# Altium PCB PCB1.pcbdoc
Units mil, origin at the board's own origin, x right, y up, seen from the top; angles counter-clockwise.
Board outline 2805 x 4025 mil, 2 copper layers (Top Layer, Bottom Layer), stack 62.2 mil thick; 30 components, 34 nets, 171 pads, 95 vias.
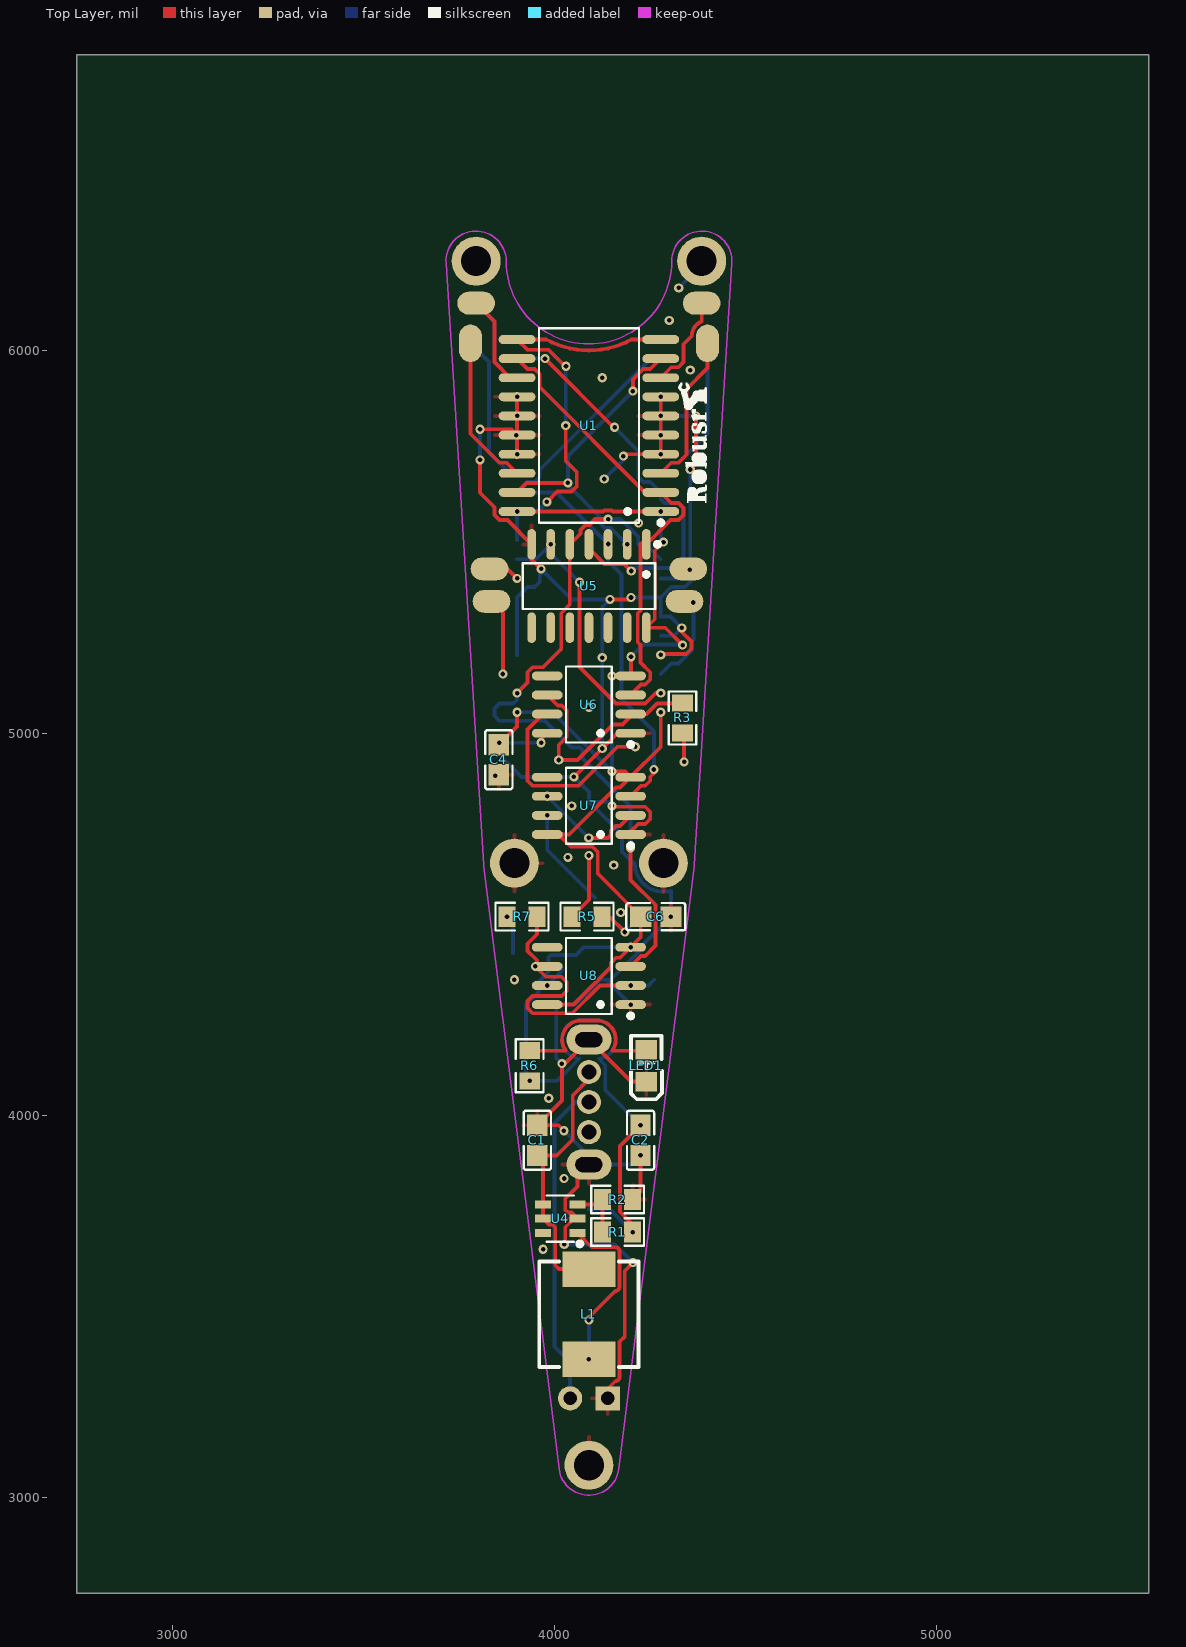
[diagram p0: Top Layer view]
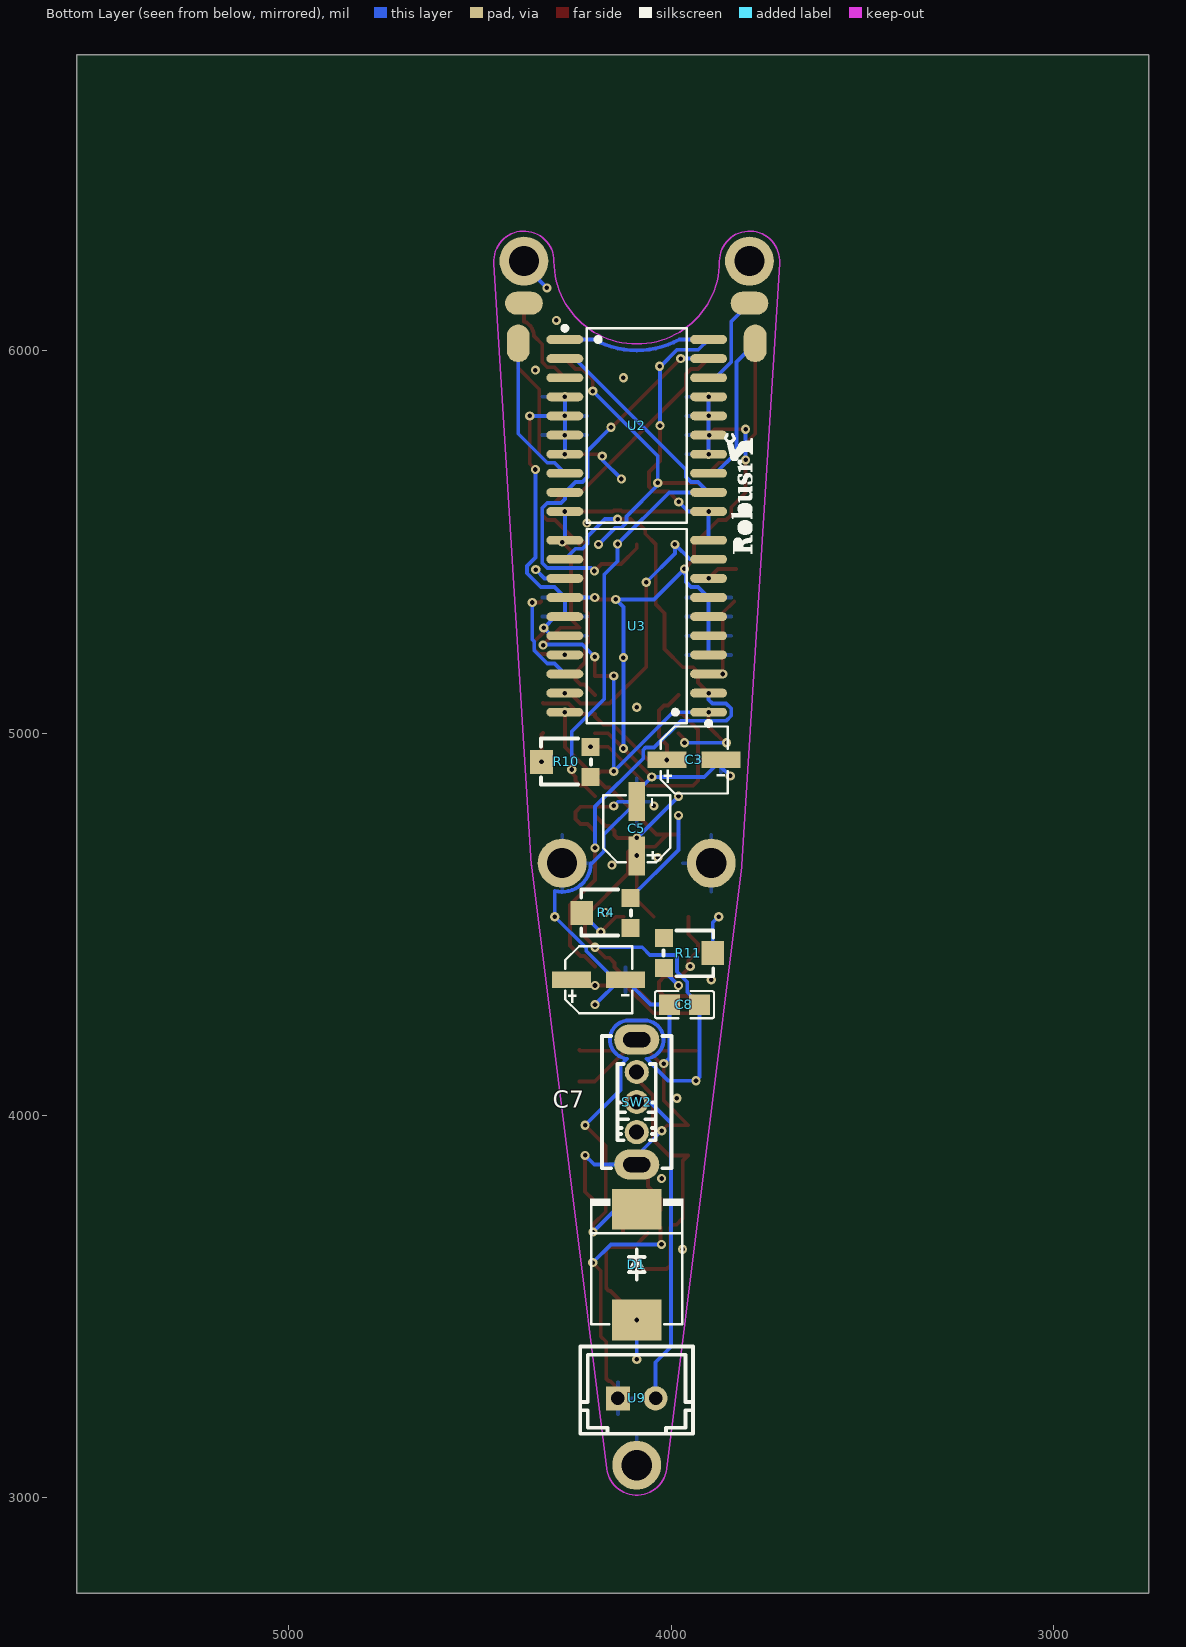
[diagram p1: Bottom Layer view, seen from below]

## Layer stack, top to bottom
Top Solder Mask Layer: solder mask 0.4, Dk 3.3
Top Layer: signal copper 1.4
Dielectric1: surface 59.4, FR4, Dk 4.5
Bottom Layer: signal copper 1.4
Bottom Solder Mask Layer: solder mask 0.4, Dk 3.3

## Board outline
5555,2750 2750,2750 2750,6775 5555,6775

## Design rules (kind name [scope] priority, off if disabled: settings)
BoardOutlineClearance copperThickness1oz [All] p0: genericclearance=10 ignorepadtopadclearanceinfootprint=FALSE except(0: Arc-SplitContinuation Track-SplitContinuation SMDPad-SplitContinuation THPad-SplitContinuation Via-SplitContinuation Fill-SplitContinuation Poly-SplitContinuation Region-SplitContinuation Text-SplitContinuation)
BoardOutlineClearance copperThickness2oz [All] p0: genericclearance=10 ignorepadtopadclearanceinfootprint=FALSE except(0: Arc-SplitContinuation Track-SplitContinuation SMDPad-SplitContinuation THPad-SplitContinuation Via-SplitContinuation Fill-SplitContinuation Poly-SplitContinuation Region-SplitContinuation Text-SplitContinuation)
BoardOutlineClearance Plane_innerPlane [All] p0: genericclearance=10 ignorepadtopadclearanceinfootprint=FALSE except(0: Arc-SplitContinuation Track-SplitContinuation SMDPad-SplitContinuation THPad-SplitContinuation Via-SplitContinuation Fill-SplitContinuation Poly-SplitContinuation Region-SplitContinuation Text-SplitContinuation)
BoardOutlineClearance Copper_copperRegion [All] p0: genericclearance=10 ignorepadtopadclearanceinfootprint=FALSE except(0: Arc-SplitContinuation Track-SplitContinuation SMDPad-SplitContinuation THPad-SplitContinuation Via-SplitContinuation Fill-SplitContinuation Poly-SplitContinuation Region-SplitContinuation Text-SplitContinuation)
BoardOutlineClearance otherClearance [All] p0: genericclearance=10 ignorepadtopadclearanceinfootprint=FALSE except(0: Arc-SplitContinuation Track-SplitContinuation SMDPad-SplitContinuation THPad-SplitContinuation Via-SplitContinuation Fill-SplitContinuation Poly-SplitContinuation Region-SplitContinuation Text-SplitContinuation)
Clearance copperThickness1oz [All] p1: gap=7 ignorepadtopadclearanceinfootprint=FALSE
Clearance copperThickness2oz [All] p1: gap=7 ignorepadtopadclearanceinfootprint=FALSE
Clearance Plane_innerPlane [All] p1: gap=7 ignorepadtopadclearanceinfootprint=FALSE
Clearance Copper_copperRegion [All] p1: gap=7 ignorepadtopadclearanceinfootprint=FALSE
Clearance otherClearance [All] p1: gap=7 ignorepadtopadclearanceinfootprint=FALSE
DiffPairsRouting differentialPair [All] p1: maxuncoupledlength=10 minlimit=6 maxlimit=Infinity mostfreqgap=6 toplayer_minwidth=5 toplayer_prefwidth=10 toplayer_maxwidth=100 bottomlayer_minwidth=5 bottomlayer_prefwidth=10 bottomlayer_maxwidth=100
PasteMaskExpansion pasteMaskExpansion [All] p1: expansion=0
PlaneConnect innerPlane [All] p1: planeconnectstyle=Relief reliefexpansion=20 reliefentries=4 reliefconductorwidth=10 reliefairgap=10
PolygonConnect copperRegion [All] p1: connectstyle=Relief reliefentries=4 reliefconductorwidth=10 polygonreliefangle="90 Angle" airgapwidth=10
RoutingVias viaSize [All] p1: viastyle="Through Hole" holewidth=12.0078 minholewidth=11.811 maxholewidth=248.0314 width=12.0078 minwidth=11.811 maxwidth=248.0314
SolderMaskExpansion solderMaskExpansion [IsVia] p1: useseparateexpansions=TRUE expansion=-1000 expansionbottom=-1000
SolderMaskExpansion solderMaskExpansion [All] p2: useseparateexpansions=TRUE expansion=2 expansionbottom=2
Width copperThickness1oz [All] p1: maxlimit=100 minlimit=5 preferedwidth=10
Width copperThickness2oz [All] p1: maxlimit=100 minlimit=8 preferedwidth=10

## Components (designator, comment, footprint, x,y, rotation, side; value= is the part's Value field where it differs from the comment)
C1 "22uF" C0805#1 3955,3935 r90 top locked
C2 "22uF" C0805#1 4225,3935 r270 top locked
C3 "10uF" CAP-SMD_BD4.0-L4.3-W4.3-LS5.1-FD 3940,4930 r180 bottom locked
C4 "100nF" C0805#2 3854.4,4930.6 r90 top locked
C5 "10uF" CAP-SMD_BD4.0-L4.3-W4.3-LS5.1-FD 4090,4750 r90 bottom locked
C6 "100nF" C0805#1 4265,4520 r180 top locked
C7 "10uF" CAP-SMD_BD4.0-L4.3-W4.3-LS5.1-FD 4190,4355 r180 bottom locked
C8 "100nF" C0805#1 3965,4290 r180 bottom locked
D1 "SS34" SMC_L6.9-W5.9-LS7.9-RD 4090,3610 r270 bottom locked
L1 "10uH" IND-SMD_L7.3-W6.8 4090,3480 r90 top locked
LED1 "GL0805UG01" LED0805-FD 4240,4130 r270 top locked
R1 "16kΩ" R0805 4165,3695 r0 top locked
R2 "2.2kΩ" R0805 4165,3780 r180 top locked
R3 "10kΩ" R0805 4335,5040 r270 top locked
R4 "100kΩ" RES-ADJ-SMD_JER33X-1-14 4170,4530 r90 bottom locked
R5 "10kΩ" R0805 4085,4520 r0 top locked
R6 "1kΩ" R0805 3935,4130 r90 top locked
R7 "10kΩ" R0805 3915,4520 r180 top locked
R10 "100kΩ" RES-ADJ-SMD_JER33X-1-14 4275,4925 r90 bottom locked
R11 "100kΩ" RES-ADJ-SMD_JER33X-1-14 3955,4425 r270 bottom locked
SW2 "SS12D07VG4 087" SW-TH_SS12D07VG4 4090,4035 r90 bottom locked
U1 "L293DD013TR" SOP-20_L13.2-W7.8-P1.27-LS10.4-BL 4090,5805 r90 top locked
U2 "L293DD013TR" SOP-20_L13.2-W7.8-P1.27-LS10.4-BL 4090,5805 r270 bottom locked
U3 "L293DD013TR" SOP-20_L13.2-W7.8-P1.27-LS10.4-BL 4090,5280 r90 bottom locked
U4 "MT3608" SOT-23-6_L2.9-W1.6-P0.95-LS2.8-BL 4015,3730 r90 top locked
U5 "74HC04D,653" SOIC-14_L8.7-W3.9-P1.27-LS6.0-BL 4090,5385 r180 top locked
U6 "NE555DR" SOIC-8_L4.9-W3.9-P1.27-LS6.0-BL 4090,5075 r90 top locked
U7 "NE555DR" SOIC-8_L4.9-W3.9-P1.27-LS6.0-BL 4090,4810 r90 top locked
U8 "NE555DR" SOIC-8_L4.9-W3.9-P1.27-LS6.0-BL 4090,4365 r90 top locked
U9 "WAFER-XH254Z-2AM" CONN-TH_2P-P2.50_XH-2A_3045048 4090,3260 r180 bottom locked

## Footprints (in the part's own frame and the unit in brackets; to place one, negate y for a bottom-side part, rotate by r counter-clockwise, add the part's x,y. Pads: shape width x height; smd on the part's side, far side on the other; paste and mask are expansions set on the pad)
C0805#1 [mil]
  rect 55.5x53.1 smd paste-3937 mask+2: 1(-39.4,0) 2(39.4,0)
  silkscreen extent -77,-36 77,36
C0805#2 [mil]
  rect 55.5x53.1 smd paste-3937 mask+2: 1(-39.3,0) 2(39.4,0)
  silkscreen extent -77,-36 77,36
CAP-SMD_BD4.0-L4.3-W4.3-LS5.1-FD [mil]
  rect 102.4x43.3 smd: 1(-70.9,0) 2(70.9,0)
  silkscreen extent -87,-88 88,88
CONN-TH_2P-P2.50_XH-2A_3045048 [mil]
  rect 63x63 hole 35.4 paste+0 mask+2: 1(-49.2,0)
  round 63 hole 35.4 paste+0 mask+2: 2(49.2,0)
  silkscreen extent -148,-93 148,136
IND-SMD_L7.3-W6.8 [mil]
  rect 92.5x137.8 smd: 1(-118.1,0) 2(118.1,0)
  silkscreen extent -138,-130 138,130
LED0805-FD [mil]
  rect 51.2x55.1 smd: 1(-41.4,0) 2(41.3,0)
  silkscreen extent -78,-40 88,41
R0805 [mil]
  rect 44.6x54.2 smd paste-3937 mask+2: 1(-39.4,0) 2(39.4,0)
  silkscreen extent -69,-36 69,36
RES-ADJ-SMD_JER33X-1-14 [mil]
  rect 47.2x47.2 smd paste+0 mask+2: 1(39.4,-64) 3(-39.4,-64)
  rect 63x59.1 smd paste+0 mask+2: 2(0,64)
  silkscreen extent -59,-65 61,65
SMC_L6.9-W5.9-LS7.9-RD [mil]
  rect 106.3x129.9 smd: 1(-145.1,0) 2(145.1,0)
  silkscreen extent -172,-122 157,122
SOIC-8_L4.9-W3.9-P1.27-LS6.0-BL [mil]
  oval 23.1x80.5 smd: 1(-75,-109.1) 2(-25,-109.1) 3(25,-109.1) 4(75,-109.1) 5(75,109.2) 6(25,109.2) 7(-25,109.2) 8(-75,109.2)
  silkscreen extent -110,-115 100,60
SOIC-14_L8.7-W3.9-P1.27-LS6.0-BL [mil]
  oval 22.6x80.2 smd: 1(-150,-109) 2(-100,-109) 3(-50,-109) 4(0,-109) 5(50,-109) 6(100,-109) 7(150,-109) 8(150,109) 9(100,109) 10(50,109) 11(0,109) 12(-50,109) 13(-100,109) 14(-150,109)
  silkscreen extent -185,-115 173,60
SOP-20_L13.2-W7.8-P1.27-LS10.4-BL [mil]
  oval 23.1x96.5 smd: 1(-225,-188) 2(-175,-188) 3(-125,-188) 4(-75,-188) 5(-25,-188) 6(25,-188) 7(75,-188) 8(125,-188) 9(175,-188) 10(225,-188) 11(225,188) 12(175,188) 13(125,188) 14(75,188) 15(25,188) 16(-25,188) 17(-75,188) 18(-125,188) 19(-175,188) 20(-225,188)
  silkscreen extent -260,-194 254,131
SOT-23-6_L2.9-W1.6-P0.95-LS2.8-BL [mil]
  rect 20.9x42.2 smd: 1(-37.4,-45.2) 2(0,-45.2) 3(37.4,-45.2) 4(37.4,45.2) 5(0,45.2) 6(-37.4,45.2)
  silkscreen extent -72,-57 61,35
SW-TH_SS12D07VG4 [mil]
  round 63 hole 39.4: 1(-78.7,0) 2(0,0) 3(78.7,0)
  oval 78.7x118.1 hole 39.4 slot 70.9 at 90 deg: 4(163.4,0) 5(-163.4,0)
  silkscreen extent -173,-91 173,91

## Free pads (board coordinates)
  oval 60x98.4 smd: 1(3780,6020) 1(4400,6020)
  oval 60x98.4 smd far side: 1(3780,6020) 1(4400,6020)
  oval 98.4x60 smd: 1(3795,6125) 1(3830,5430) 1(3835,5345) 1(4340,5345) 1(4350,5430) 1(4385,6125)
  oval 98.4x60 smd far side: 1(3795,6125) 1(4385,6125)
  round 128 hole 78.7: 1(3795,6235) 1(3895,4660) 1(4090,3085) 1(4285,4660) 2(4385,6235)

## Via types
v1: diameter 24, hole 12, Top Layer to Bottom Layer, 95 vias

## Nets (pads, with @x,y where several pads share a name; then routed paths per layer and width w, separated by ;. In a path a pad name is that pad's centre, name@x,y a point inside that pad or via, vN(x,y) a via of type N, cw(c..) or ccw(c..) an arc to the next point about the centre after c; other vN are vias at no path point)
3.7V: SW2.2 U9.2 | length 849.7
  Bottom Layer w10: U9.2 4040.8,3354.2 4000,3395 4000,3980 4055,4035 SW2.2
5V: C2.1 C4.2 C6.2 C8.2 D1.1 R1.2 R6.1 U1.1 U1.10 U1.11 U1.20 U2.1 U2.10 U2.11 U2.20 U3.1 U3.10 U3.11 U3.20 U5.14 U6.4 U6.8 U7.4 U7.8 U8.4 U8.8 | length 6538
  Top Layer w10: C4.2 3902,5017.6 v1(3902,5055) ; v1(3902,5580) 4127.5,5580 4130.5,5583 4149.5,5583 4152.5,5580 v1(4278,5580) ; v1(3965,4975) 3965,4984.1 U6.8 ; 3978.2,6030 U1.11 3929,6003 3984.5,6003 4027.5,5960 v1(4030,5960) ; 3978.32,6029.97 ccw(c4090,6234.8) 4201.68,6029.97 ; v1(3980,5605) 4007,5632 4044.5,5632 4058,5645.5 4058,5683 4029.2,5711.7 v1(4029.2,5804.7) ; U8.8 4049.2,4290 4147.9,4388.8 4147.9,4399.3 4161.1,4412.6 4171.7,4412.6 v1(4199.1,4440) 4225.6,4466.5 C6.2 4113,4632.6 4113,4689.5 4099.5,4703 4042.6,4703 U7.8@4010.6,4735 ; U7.8 U7.8@4010.6,4735 ; v1(4150,4900) 4184.1,4900 U7.4 ; v1(4150,5150) U6.4 4200,5150.9 v1(4200,5200) ; 4201.8,6030 U1.10 ; v1(4204.4,3695) 4204.4,3715.1 4171.1,3748.3 4171.1,3920.5 v1(4225,3974.4) ; v1(4278,5055) 4278,4963.8 U7.4 ; v1(4285,5500) 4262.3,5477.3 4262.3,5298.3 U5.14 4289.5,5276 v1(4335,5230.5) ; U7.8@4010.6,4735 4038.6,4735 4161.1,4857.6 4171.7,4857.6 U7.4
  Bottom Layer w10: v1(3855,4975) v1(3965,4975) ; v1(3902,5055) 3995,5055 v1(4150,4900) v1(4150,5150) ; U3.10 v1(3902,5580) 3955,5580 v1(3980,5605) ; 3978.2,6030 U2.20 3929,6003 3984.5,6003 4029.2,5958.3 v1(4029.2,5804.7) ; 3978.32,6029.97 ccw(c4090,6234.8) 4201.68,6029.97 ; 4064.51,4148.33 cw(c4070.3,4198.4) 4070.3,4248.8 ; 4064.5,4148.4 4006.8,4090.6 v1(3935,4090.6) 3925.6,4100 C8.2 3957.9,4322.2 3957.9,4349.5 3984.4,4376 3984.4,4413.8 3990.8,4420.2 4055.9,4420.2 4075.6,4440 v1@4200,4440 ; 4070.3,4248.7 4109.7,4248.7 ; D1.1 4144.2,3755.1 v1(4204.4,3695) ; 4109.7,4248.8 cw(c4109.7,4198.4) 4115.49,4148.33 ; 4115.5,4148.4 4132.5,4131.3 4132.5,4066.9 v1(4225,3974.4) ; v1(4200,5200) 4232.4,5232.4 4324,5232.4 4325.9,5230.5 v1(4335,5230.5) ; 4201.8,6030 U2.1 ; U3.11 v1(4278,5580)
$1N11: D1.2 L1.1 U4.1 | length 448.8
  Top Layer w10: U4.1 4097.5,3655.4 4158.9,3655.4 cw(c4158.9,3644.4) 4169.9,3644.4 4169.9,3551.8 cw(c4158.9,3551.8) 4158.9,3540.8 ; v1(4090,3464.9) 4090,3472 4158.9,3540.9
  Bottom Layer w10: v1(4090,3361.9) v1(4090,3464.9)
$1N13: R1.1 R2.2 U4.3 | length 155.6
  Top Layer w10: U4.3 4113,3767.4 R2.2 R1.1
$1N18: R10.1 U6.7 | length 530.8
  Top Layer w10: U6.7 3970.3,5050 3929.6,5009.3 3929.6,4875.7 3942.8,4862.4 4062.4,4862.4 4164.4,4964.4 v1(4211,4964.4)
$1N19: R3.2 R10.2 | length 77.3
  Top Layer w10: R3.2 4339,4996.6 v1(4339,4925)
$1N20: C3.1 R3.1 U6.2 U6.6 | length 595.7
  Top Layer w10: U6.6 4008.3,5072.6 4018.9,5072.6 4032.1,5059.3 4032.1,4990.7 4010.9,4969.4 v1(4010.9,4930) 4060,4930 4152.6,5022.6 4177.6,5022.6 4199.1,5044.1 U6.2 4240.5,5050 4268.5,5078 4333.6,5078 R3.1
$1N23: C5.1 R5.1 U7.2 U7.6 | length 472.7
  Top Layer w10: R5.1 4090,4564.4 v1(4090,4680) ; v1(4089.5,4726) 4140.1,4726 4147.9,4733.8 4147.9,4744.3 4161.1,4757.6 4171.7,4757.6 U7.2
  Bottom Layer w10: v1(3980.8,4835) 3980.8,4834.6 v1(4089.5,4726)
$1N24: R4.2 R5.2 | length 146.8
  Top Layer w10: R5.2 4143.9,4520 v1(4184,4480)
  Bottom Layer w10: v1(4184,4480) R4.2
$1N25: R4.1 U7.7 | length 267.5
  Bottom Layer w10: v1(3980.8,4785) 3980.8,4694.5 R4.1
$1N29: C7.1 R7.1 U8.2 U8.6 | length 780.1
  Top Layer w10: R7.1 3954.4,4474.1 3929.6,4449.3 3929.6,4430.7 3954.4,4405.9 3954.4,4394.4 v1(3950,4390) 3977,4363 4018.4,4363 4032.1,4349.3 4032.1,4325.8 4018.9,4312.6 3942.8,4312.6 3929.6,4299.3 3929.6,4280.7 3942.8,4267.4 4046.4,4267.4 4119,4340 v1(4199.1,4340)
  Bottom Layer w10: v1(4199.1,4340) 4245.9,4340 C7.1
$1N30: R7.2 R11.2 | length 101.4
  Bottom Layer w10: v1(3875.6,4520) 3891,4504.6 R11.2
$1N31: R11.1 U8.7 | length 61.5
  Bottom Layer w10: v1(3980.8,4340) 4019,4378.1 R11.1
$1N91: LED1.1 R6.2 | length 443.9
  Top Layer w10: R6.2 4029.2,4169.4 ; 4029.12,4169.35 cw(c4070.3,4198.4) 4070.3,4248.8 ; 4070.3,4248.7 4109.7,4248.7 ; 4109.7,4248.8 cw(c4109.7,4198.4) 4150.88,4169.35 ; 4150.8,4169.4 4238,4169.4 LED1.1
GND: C1.2 C2.2 C3.2 C4.1 C5.2 C6.1 C7.2 C8.1 LED1.2 pad.1@3895,4660 pad.1@4090,3085 pad.1@4285,4660 pad.2 R2.1 SW2.4 SW2.5 U1.4 U1.5 U1.6 U1.7 U1.14 U1.15 U1.16 U1.17 U2.4 U2.5 U2.6 U2.7 U2.14 U2.15 U2.16 U2.17 U3.4 U3.5 U3.6 U3.7 U3.14 U3.15 U3.16 U3.17 U4.2 U5.7 U6.1 U7.1 U8.1 U9.1 | length 7065.1
  Top Layer w10: v1(3805,5715) 3805,5629 3842.8,5591.2 3842.8,5570.7 3856,5557.4 3876.6,5557.4 U5.7 3940,5455 v1(3965,5430) ; v1(3805,5795) 3887,5795 U1.16 ; v1(3902,5730) U1.16 ; v1(3902,5880) v1(3902,5830) U1.16 ; v1(4024.5,3960) 4010.2,3974.4 C1.2 4019.3,4038.7 v1(4019.3,4135.7) 4027.3,4135.7 SW2.4 4199.7,4088.7 LED1.2 ; v1(4025.2,3662.6) 4028.2,3665.5 4028.2,3707.6 4050.5,3730 U4.2 4044.3,3745.9 4034.6,3745.9 4028.2,3752.4 4028.2,3782.4 4060.2,3814.5 4060.2,3841.9 SW2.5 ; v1(4050.8,4885.8) v1(4125,4960) 4165,5000 U6.1 ; U9.1 4139.2,3285 4158.9,3304.6 ccw(c4158.9,3315.6) 4169.9,3315.6 4169.9,3408.2 4183.9,3422.2 4183.9,3593.9 v1(4205,3615) ; v1(4145,5350) 4195,5350 v1(4200,5355) ; v1(4150,4810) 4158.7,4810 4161.1,4807.6 4237.2,4807.6 4250.4,4794.3 4250.4,4775.7 4237.2,4762.4 4219,4762.4 4199.1,4742.6 U7.1 ; v1(4180,5725) 4185,5730 v1(4278,5730) v1(4278,5780) v1(4278,5830) v1(4278,5880) ; R2.1 4225,3800.6 v1(4225,3895.6) ; v1(4278,5205) 4280.5,5207.5 4344.5,5207.5 4358,5221 4358,5240 4333,5265 v1(4333,5275.5) ; v1(4355,5690) 4370,5705 v1(4370,5830)
  Bottom Layer w10: v1(3805,5715) v1(3805,5795) ; v1(3845.3,4888.2) 3869.1,4912 C3.2 3913.4,4885.8 v1(4050.8,4885.8) 4090,4846.5 C5.2 ; U3.4 U3.5 U3.6 U3.7 3929.5,5382.4 3948,5382.4 3961.2,5395.7 3961.2,5414.2 3965,5418 v1(3965,5430) 4045,5350 v1(4145,5350) 4125,5330 v1(4125,5197.8) v1(4125,4960) ; v1(3902,5730) U2.15 v1(3902,5830) v1(3902,5880) ; v1(4019.3,4135.7) 4004.4,4150.6 C8.1 4054.1,4290 C7.2 C7.2@4134.1,4355 ; v1(4024.5,3960) 4090,3894.5 SW2.5 4201,3871.6 v1(4225,3895.6) ; v1(4025.2,3662.6) 4157.4,3662.6 v1(4205,3615) ; v1(4130,5665) 4180,5715 v1(4180,5725) ; v1(4150,4810) 4139.1,4820.9 C5.2 ; v1(4199.1,4290) C7.2@4134.1,4355 ; v1(4200,5355) U3.14 ; U3.16 4312.5,5255 v1(4333,5275.5) 4303.4,5305 U3.15 U3.14 ; v1(4278,5730) v1(4278,5780) v1(4278,5830) ; v1(4278,5880) v1(4278,5830) ; 4304.41,4587.56 cw(c4285,4660) 4210,4660 4206.6,4660 4176.2,4690.5 4176.2,4734.7 C5.2 ; 4304.4,4587.6 v1(4304.4,4520) 4222.1,4437.8 4222.1,4430.5 4146.7,4355 C7.2@4134.1,4355 ; v1(4325,6165) 4385,6225 pad.2 ; v1(4355,5690) 4355,5459.8 4377.2,5437.5 4377.2,5418.5 4341.2,5382.4 4305.4,5382.4 U3.14 ; v1(4370,5830) v1(4278,5830)
  other v1: 3970,3650 4025,3835 3985,4045 3895,4355 4173,4531 4155,4655 4035,4675 4045,4810 4090,5068.1 4220,5550 3900,5780 4125,5930 4355,5950 4300,6080
M1GND: pad.1@4385,6125 U1.8 | length 250.2
  Top Layer w10: U1.8 4305.4,5957.4 4324,5957.4 4337.2,5970.7 4337.2,6017.4 4359,6039.2 cw(c4400,6039.2) 4384.97,6077.35 ; 4385,6077.4 pad.1@4385,6125
M1VCC: pad.1@4400,6020 U1.3 | length 401.4
  Top Layer w10: U1.3 4305.4,5707.4 4324,5707.4 4345,5728.5 4345,5900 4400,5955 pad.1@4400,6020
M2GND: pad.1@3780,6020 U1.18 | length 401.4
  Top Layer w10: pad.1@3780,6020 3780,5783.5 3856,5707.4 3874.6,5707.4 U1.18
M2VCC: pad.1@3795,6125 U1.13 | length 250.2
  Top Layer w10: pad.1@3795,6125 3842.8,6077.2 3842.8,5970.7 3883.5,5930 U1.13
M3GND: pad.1@4400,6020 U2.8 | length 401.4
  Bottom Layer w10: U2.8 4305.4,5707.4 4324,5707.4 4400,5783.5 pad.1@4400,6020
M3VCC: U2.3
M4GND: pad.1@3780,6020 U2.13 | length 401.4
  Bottom Layer w10: pad.1@3780,6020 3828.8,5971.2 3828.8,5734.7 3883.5,5680 U2.13
M4VCC: pad.1@3795,6125 U2.18 | length 250.2
  Bottom Layer w10: pad.1@3795,6125 3842.8,6077.2 3842.8,5970.7 3883.5,5930 U2.18
M5GND: pad.1@3830,5430 U3.8 | length 82.4
  Top Layer w10: pad.1@3830,5430 3877,5430 v1(3902,5405)
M5VCC: pad.1@3835,5345 U3.3 | length 202.4
  Top Layer w10: pad.1@3835,5345 3865,5315 v1(3865,5155)
M6GND: pad.1@4350,5430 U3.13 | length 90.7
  Top Layer w10: pad.1@4350.1,5430.1 4352.1,5428 v1(4354.2,5428)
  Bottom Layer w10: U3.13 4331.2,5405 v1(4354.2,5428)
M6VCC: pad.1@4340,5345 U3.18 | length 257.7
  Top Layer w10: pad.1@4340,5345 4343,5342 v1(4363.3,5342)
  Bottom Layer w10: U3.18 4305.4,5182.4 4324,5182.4 4358,5216.4 4358,5240 4363.3,5245.4 v1(4363.3,5342)
MA: U1.9 U1.19 U5.2 | length 814.7
  Top Layer w10: U1.19 3927,5655 v1(4035,5655) ; v1(4205,5895) 4205,5925.6 4232,5952.6 4250.5,5952.6 U1.9
  Bottom Layer w10: v1(4190,5494) 4147,5537 4130.5,5537 4117,5550.5 4117,5567 4035,5649 v1(4035,5655) 4035,5725 v1(4205,5895)
MB: U2.9 U2.19 U5.4 | length 1081.7
  Top Layer w10: v1(3975,5980) 4154.7,5800.3 v1(4157.2,5800.3) ; U5.4 4090,5483.7 4130.8,5442.9 4182.1,5442.9 v1(4200.7,5424.3)
  Bottom Layer w10: U2.19 v1(3975,5980) ; v1(4157.2,5800.3) 4218.8,5738.7 4218.8,5670.7 4232,5657.4 4250.5,5657.4 U2.9 4278,5612.5 4287.9,5602.6 4324,5602.6 4337.2,5589.3 4337.2,5445.7 4324,5432.4 4208.8,5432.4 v1(4200.7,5424.3)
MC: U3.9 U3.19 U5.6 | length 720
  Top Layer w10: v1(4065,5395) 4065,5173.6 4161.1,5077.4 4237.2,5077.4 4264.7,5105 v1(4278,5105)
  Bottom Layer w10: U3.9 3951,5455 v1(3990,5494) 3990,5470 v1(4065,5395)
SA: U1.2 U1.12 U5.1 U6.3 | length 1223.3
  Top Layer w10: U1.12 3929.5,5952.6 3948,5952.6 3961.2,5939.3 3961.2,5905.3 4236.5,5630 U1.2 4305.4,5602.6 4324,5602.6 4337.2,5589.3 4337.2,5570.7 4324,5557.4 4303.4,5557.4 U5.1 4240,5495 4235.6,5499.4 4229.4,5499.4 4225,5495 4225,5321.3 4217.7,5314 4217.7,5237.9 4225,5230.6 4225,5184.7 4250.4,5159.3 4250.4,5140.7 4237.2,5127.4 4226.6,5127.4 U6.3
SB: U2.2 U2.12 U5.3 U7.3 | length 1566.8
  Top Layer w10: U7.3 4226.6,4862.4 4237.2,4862.4 4250.4,4875.7 4250.4,4886.2 4260,4895.9 v1(4260,4905)
  Bottom Layer w10: v1(4260,4905) 4260,5004.4 4175,5089.4 4175,5415 4140,5450 v1(4140,5495) 4005,5630 U2.12 3929.5,5657.4 3948,5657.4 3961.2,5670.7 3961.2,5689.2 4252,5980 U2.2
SC: U3.2 U3.12 U5.5 U8.3 | length 1838.9
  Top Layer w10: v1(3902,5105) 3929.6,5132.6 3929.6,5159.3 3942.8,5172.6 3969.6,5172.6 4017.7,5220.7 4017.7,5314 4040,5336.3 U5.5 4067.7,5521.7 4067.7,5532.1 4080.8,5545.1 4091.1,5545.1 4106,5560 v1(4140,5560) ; U8.3 4226.6,4417.4 4237.2,4417.4 4264.4,4444.6 4264.4,4551.1 4199.1,4616.3 v1(4199.1,4700)
  Bottom Layer w10: v1(3902,5105) 3902,5087.5 3892.1,5077.6 3856,5077.6 3842.8,5064.3 3842.8,5045.7 3856,5032.4 3892.1,5032.4 3892.5,5032 3911.5,5032 3912,5032.4 3974.6,5032.4 4044.4,4962.6 4066.6,4962.6 4073,4956.2 4073,4934 4199.1,4807.9 v1(4199.1,4700) ; v1(4140,5560) 4173,5560 4218.8,5514.2 4218.8,5495.7 4232,5482.4 4250.5,5482.4 U3.12
VIN: C1.1 L1.2 SW2.3 U4.4 U4.5 | length 708.5
  Top Layer w10: L1.2 4011.9,3598.1 4001.8,3608.2 4001.8,3707.6 3995.4,3714.1 3985.7,3714.1 U4.5 U4.4 3969.8,3880.9 C1.1 4005.6,3895.6 4047.5,3937.5 4047.5,4052.6 4090,4095.1 SW2.3
pads on no net: R4.3 R10.3 R11.3 SW2.1 U4.6 U5.8 U5.9 U5.10 U5.11 U5.12 U5.13 U6.5 U7.5 U8.5

## Polygon pours and split planes (outlines as drawn)
GND on Bottom Layer (solid, remove dead copper, pour order 2): 3710,6320 3710,3000 4470,3000 4470,6320
GND on Top Layer (solid, remove dead copper, pour order 0): 3710,6320 3710,3000 4470,3000 4470,6320

## Keep-outs
Board Outline Layer:
  lines w3.9: 3716,6237.8 3716.7,6245.6 3718.2,6253.4 3720.4,6260.9 3723.4,6268.2 3727.1,6275.2 3731.5,6281.7 3736.5,6287.8 3742.1,6293.4 3748.2,6298.3 3754.8,6302.7 3761.8,6306.3 3769.1,6309.3 3776.7,6311.4 3784.4,6312.9 3792.3,6313.5 3800.1,6313.4 3808,6312.4 3815.7,6310.7 3823.1,6308.2 3830.3,6305 3837.2,6301.1 3843.6,6296.5 3849.5,6291.3 3854.9,6285.6 3859.7,6279.3 3863.8,6272.6 3867.2,6265.5 3869.9,6258.1 3871.9,6250.5 3873.1,6242.7 3873.5,6234.8 3873.9,6221.7 3875,6208.7 3877,6195.8 3879.8,6183 3883.3,6170.4 3887.5,6158 3892.5,6145.9 3898.3,6134.2 3904.7,6122.8 3911.8,6111.8 3919.5,6101.3 3927.9,6091.2 3936.9,6081.7 3946.4,6072.7 3956.5,6064.4 3967,6056.6 3978,6049.5 3989.4,6043.1 4001.1,6037.3 4013.2,6032.3 4025.6,6028.1 4038.2,6024.6 4051,6021.8 4063.9,6019.8 4076.9,6018.7 4090,6018.3 4103.1,6018.7 4116.1,6019.8 4129,6021.8 4141.8,6024.6 4154.4,6028.1 4166.8,6032.3 4178.9,6037.3 4190.6,6043.1 4202,6049.5 4213,6056.6 4223.5,6064.4 4233.6,6072.7 4243.1,6081.7 4252.1,6091.2 4260.5,6101.3 4268.2,6111.8 4275.3,6122.8 4281.7,6134.2 4287.5,6145.9 4292.5,6158 4296.7,6170.4 4300.2,6183 4303,6195.8 4305,6208.7 4306.1,6221.7 4306.5,6234.8 4306.9,6242.7 4308.1,6250.5 4310.1,6258.1 4312.8,6265.5 4316.2,6272.6 4320.3,6279.3 4325.1,6285.6 4330.5,6291.3 4336.4,6296.5 4342.8,6301.1 4349.7,6305 4356.9,6308.2 4364.3,6310.7 4372,6312.4 4379.9,6313.4 4387.7,6313.5 4395.6,6312.9 4403.3,6311.4 4410.9,6309.3 4418.2,6306.3 4425.2,6302.7 4431.8,6298.3 4437.9,6293.4 4443.5,6287.8 4448.5,6281.7 4452.9,6275.2 4456.6,6268.2 4459.6,6260.9 4461.8,6253.4 4463.3,6245.6 4464,6237.8 4463.9,6229.9 4365.4,4655.1 4365.2,4652.7 4365,4650.2 4168.1,3075.4 4166.8,3067.7 4164.6,3060.1 4161.8,3052.8 4158.2,3045.8 4153.9,3039.2 4149,3033.1 4143.6,3027.5 4137.6,3022.4 4131.1,3018 4124.2,3014.3 4116.9,3011.2 4109.4,3008.9 4101.7,3007.3 4093.9,3006.6 4086.1,3006.6 4078.3,3007.3 4070.6,3008.9 4063.1,3011.2 4055.8,3014.3 4048.9,3018 4042.4,3022.4 4036.4,3027.5 4031,3033.1 4026.1,3039.2 4021.8,3045.8 4018.2,3052.8 4015.4,3060.1 4013.2,3067.7 4011.9,3075.4 3815,4650.2 3814.8,4652.7 3814.6,4655.1 3716.1,6229.9 3716,6237.8

## Silkscreen, mask and mechanical layers (free items; w line width, h text height)
Top Silkscreen Layer:
  drawing of 7 lines, arcs and shapes, not listed
Bottom Silkscreen Layer:
  drawing of 7 lines, arcs and shapes, not listed

## Dimensions
5160,4660 to 5160,6234.8 on Document Layer
3000,4660 to 3000,6235 on Document Layer
4385.3,6525 to 4090,6525 on Document Layer
3794.7,6525 to 4090,6525 on Document Layer
4090,4370 to 4286.9,4370 on Document Layer
4090,4370 to 3893.1,4370 on Document Layer
5305,4660 to 5305,3085.2 on Document Layer